# EAGLE board at32uc3a3256_usb_i2s (EAGLE 9.5.1)
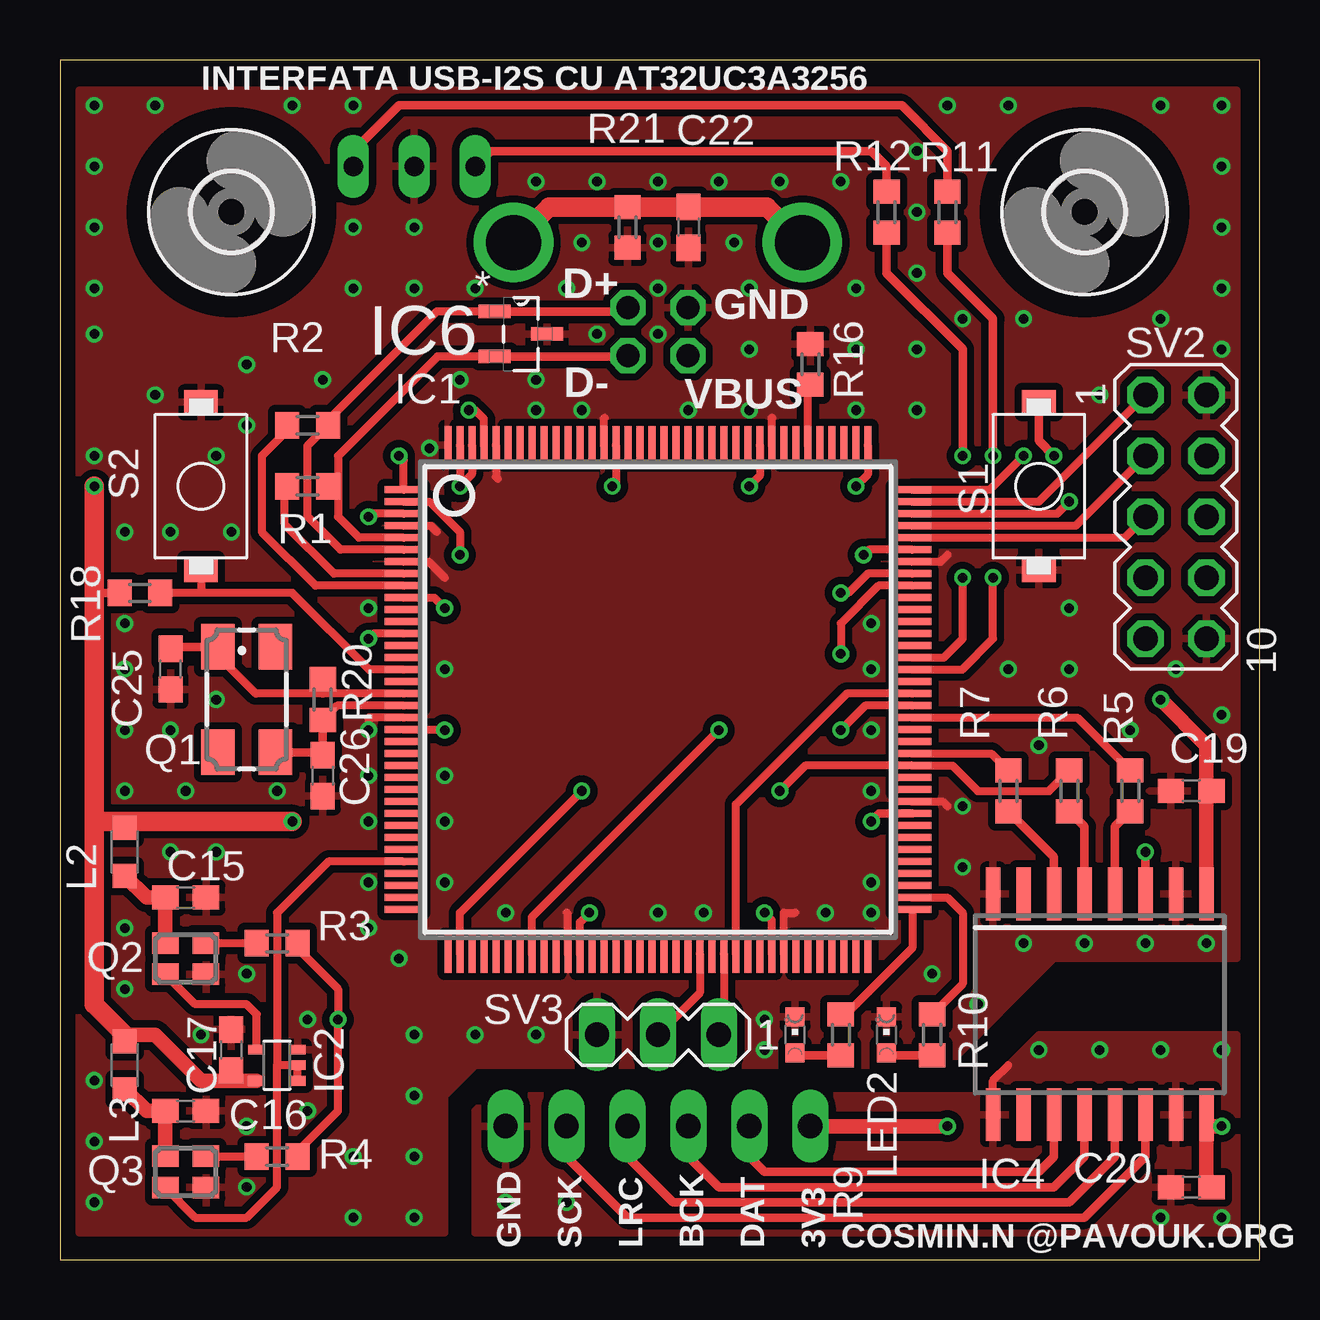
[diagram p0: board, top side]
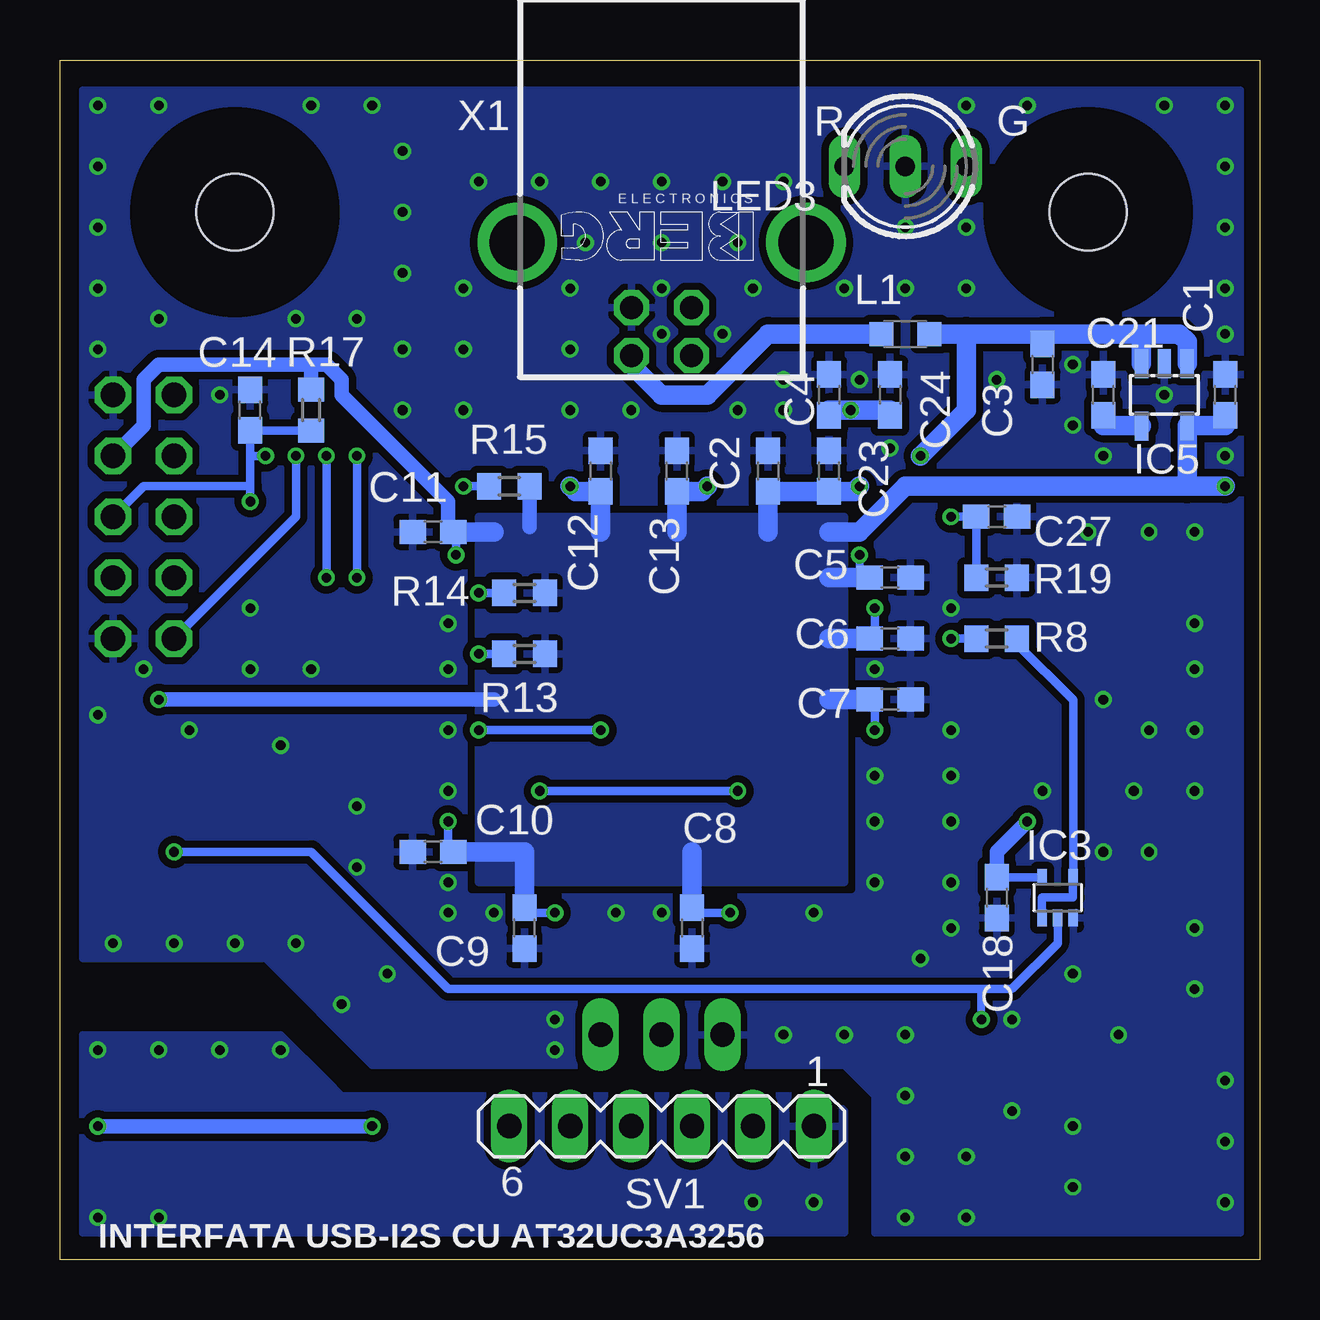
[diagram p1: board, bottom side, seen from below]

Size 50 x 50 mm. Coordinates in mm from the lower left corner, seen from the top.
Outline: 0,0 50,0 50,50 0,50 0,0
Copper layers (1*16): Top 0.035mm / dielectric 1.5mm / Bottom 0.035mm
Design rules "SeeedStudio_2layer_DRU_no_angle_20140221 *": minimum track width 6mil, minimum drill 12mil, track to track 6mil, track to pad 6mil, pad to pad 6mil, via to via 6mil, smd to smd 0mil, copper to edge 10mil, drill to drill 10mil, minimum pad ring 10mil, minimum via ring 6mil, stop-mask expansion 2mil, vias tented up to drill 100mil, thermal gap 10mil

## Footprints (pad centres in the part's own frame; a part is rotated, then mirrored left to right if it is on the bottom)
C0603 = smd 1.1 x 1: 1 -0.85,0; 2 0.85,0
3,2 = hole 3.2: 0,0
LQFP144 = smd 0.3 x 1.6: 1 -8.75,-10.6; 2 -8.25,-10.6; 3 -7.75,-10.6; 4 -7.25,-10.6; 5 -6.75,-10.6; 6 -6.25,-10.6; 7 -5.75,-10.6; 8 -5.25,-10.6; 9 -4.75,-10.6; 10 -4.25,-10.6; 11 -3.75,-10.6; 12 -3.25,-10.6; 13 -2.75,-10.6; 14 -2.25,-10.6; 15 -1.75,-10.6; 16 -1.25,-10.6; 17 -0.75,-10.6; 18 -0.25,-10.6; 19 0.25,-10.6; 20 0.75,-10.6; 21 1.25,-10.6; 22 1.75,-10.6; 23 2.25,-10.6; 24 2.75,-10.6; 25 3.25,-10.6; 26 3.75,-10.6; 27 4.25,-10.6; 28 4.75,-10.6; 29 5.25,-10.6; 30 5.75,-10.6; 31 6.25,-10.6; 32 6.75,-10.6; 33 7.25,-10.6; 34 7.75,-10.6; 35 8.25,-10.6; 36 8.75,-10.6; 73 8.75,10.6; 74 8.25,10.6; 75 7.75,10.6; 76 7.25,10.6; 77 6.75,10.6; 78 6.25,10.6; 79 5.75,10.6; 80 5.25,10.6; 81 4.75,10.6; 82 4.25,10.6; 83 3.75,10.6; 84 3.25,10.6; 85 2.75,10.6; 86 2.25,10.6; 87 1.75,10.6; 88 1.25,10.6; 89 0.75,10.6; 90 0.25,10.6; 91 -0.25,10.6; 92 -0.75,10.6; 93 -1.25,10.6; 94 -1.75,10.6; 95 -2.25,10.6; 96 -2.75,10.6; 97 -3.25,10.6; 98 -3.75,10.6; 99 -4.25,10.6; 100 -4.75,10.6; 101 -5.25,10.6; 102 -5.75,10.6; 103 -6.25,10.6; 104 -6.75,10.6; 105 -7.25,10.6; 106 -7.75,10.6; 107 -8.25,10.6; 108 -8.75,10.6 | smd 1.6 x 0.3: 37 10.6,-8.75; 38 10.6,-8.25; 39 10.6,-7.75; 40 10.6,-7.25; 41 10.6,-6.75; 42 10.6,-6.25; 43 10.6,-5.75; 44 10.6,-5.25; 45 10.6,-4.75; 46 10.6,-4.25; 47 10.6,-3.75; 48 10.6,-3.25; 49 10.6,-2.75; 50 10.6,-2.25; 51 10.6,-1.75; 52 10.6,-1.25; 53 10.6,-0.75; 54 10.6,-0.25; 55 10.6,0.25; 56 10.6,0.75; 57 10.6,1.25; 58 10.6,1.75; 59 10.6,2.25; 60 10.6,2.75; 61 10.6,3.25; 62 10.6,3.75; 63 10.6,4.25; 64 10.6,4.75; 65 10.6,5.25; 66 10.6,5.75; 67 10.6,6.25; 68 10.6,6.75; 69 10.6,7.25; 70 10.6,7.75; 71 10.6,8.25; 72 10.6,8.75; 109 -10.6,8.75; 110 -10.6,8.25; 111 -10.6,7.75; 112 -10.6,7.25; 113 -10.6,6.75; 114 -10.6,6.25; 115 -10.6,5.75; 116 -10.6,5.25; 117 -10.6,4.75; 118 -10.6,4.25; 119 -10.6,3.75; 120 -10.6,3.25; 121 -10.6,2.75; 122 -10.6,2.25; 123 -10.6,1.75; 124 -10.6,1.25; 125 -10.6,0.75; 126 -10.6,0.25; 127 -10.6,-0.25; 128 -10.6,-0.75; 129 -10.6,-1.25; 130 -10.6,-1.75; 131 -10.6,-2.25; 132 -10.6,-2.75; 133 -10.6,-3.25; 134 -10.6,-3.75; 135 -10.6,-4.25; 136 -10.6,-4.75; 137 -10.6,-5.25; 138 -10.6,-5.75; 139 -10.6,-6.25; 140 -10.6,-6.75; 141 -10.6,-7.25; 142 -10.6,-7.75; 143 -10.6,-8.25; 144 -10.6,-8.75
SC70-5 = smd 0.4 x 0.7: 1 -0.65,-0.85; 2 0,-0.85; 3 0.65,-0.85; 4 0.65,0.85; 5 -0.65,0.85
SO-16DW = smd 0.6 x 2.2: 1 -4.445,-4.6; 2 -3.175,-4.6; 3 -1.905,-4.6; 4 -0.635,-4.6; 5 0.635,-4.6; 6 1.905,-4.6; 7 3.175,-4.6; 8 4.445,-4.6; 9 4.445,4.6; 10 3.175,4.6; 11 1.905,4.6; 12 0.635,4.6; 13 -0.635,4.6; 14 -1.905,4.6; 15 -3.175,4.6; 16 -4.445,4.6
SOT23-DBV = smd 0.55 x 1.2: 1 -0.95,-1.3; 2 0,-1.3; 3 0.95,-1.3; 4 0.95,1.3; 5 -0.95,1.3
SOT95P237X112-3N = smd 1.321 x 0.559: 1 -1.092,0.94; 2 -1.092,-0.94; 3 1.092,0
L2012C = smd 1 x 1: 1 -1,0; 2 1,0
CHIPLED_0603 = smd 0.8 x 0.8: A 0,-0.75; C 0,0.75
DUOLED5MM = drill 0.813 long: AG -2.54,0; AR 2.54,0; K 0,0
CTS406 = smd 1.9 x 1.4: 1 -2.2,-1.2; 2 2.2,-1.2; 3 2.2,1.2; 4 -2.2,1.2
CRYSTAL2.5X2 = smd 1.1 x 0.9: 1 -0.85,-0.65; 2 0.85,-0.65; 3 0.85,0.65; 4 -0.85,0.65
R0603 = smd 1 x 1.1: 1 -0.85,0; 2 0.85,0
SWITCH-KSR = smd 1 x 1.4: 1 -3.5,0; 2 3.5,0
MA06-1 = drill 1.016 long: 1 -6.35,0; 2 -3.81,0; 3 -1.27,0; 4 1.27,0; 5 3.81,0; 6 6.35,0
MA05-2 = drill 1.016 octagon: 1 -5.08,-1.27; 2 -5.08,1.27; 3 -2.54,-1.27; 4 -2.54,1.27; 5 0,-1.27; 6 0,1.27; 7 2.54,-1.27; 8 2.54,1.27; 9 5.08,-1.27; 10 5.08,1.27
MA03-1 = drill 1.016 long: 1 -2.54,0; 2 0,0; 3 2.54,0
PN61729-S = drill 0.95 octagon: 1 1.25,4.71; 2 -1.25,4.71; 3 -1.25,2.71; 4 1.25,2.71 | drill 2.3 pad 2.9: S1 -6.02,0; S2 6.02,0

## Placement (x,y rotation side)
C1  10uF  [C0603]  1.43,36.04 90 bottom
C2  4u7  [C0603]  20.48,32.87 90 bottom
C3  2u2  [C0603]  9.05,37.31 270 bottom
C4  2u2  [C0603]  17.94,36.04 270 bottom
C5  100nF  [C0603]  15.4,28.42 0 bottom
C6  100nF  [C0603]  15.4,25.88 0 bottom
C7  100nF  [C0603]  15.4,23.34 0 bottom
C8  100nF  [C0603]  23.66,13.81 270 bottom
C9  100nF  [C0603]  30.64,13.81 90 bottom
C10  100nF  [C0603]  34.45,16.99 0 bottom
C11  100nF  [C0603]  34.45,30.33 0 bottom
C12  100nF  [C0603]  27.47,32.87 270 bottom
C13  100nF  [C0603]  24.29,32.87 270 bottom
C14  100nF  [C0603]  42.07,35.41 90 bottom
C15  100nF  [C0603]  5.24,15.09 180 top
C16  100nF  [C0603]  5.24,6.2 180 top
C17  100nF  [C0603]  7.15,8.73 90 top
C18  100nF  [C0603]  10.96,15.09 270 bottom
C19  100nF  [C0603]  47.15,19.53 0 top
C20  100nF  [C0603]  47.15,3.02 180 top
C21  10nF  [C0603]  6.51,36.04 90 bottom
C22  4n7  [C0603]  26.2,43.03 270 top
C23  1nF  [C0603]  17.94,32.87 90 bottom
C24  470pF  [C0603]  15.4,36.04 270 bottom
C25  18pF  [C0603]  4.61,24.61 270 top
C26  18pF  [C0603]  10.96,20.16 270 top
C27  10pF  [C0603]  10.96,30.96 0 bottom
H1  MOUNT-HOLE3.2  [3,2]  7.15,43.66 0 top
H2  MOUNT-HOLE3.2  [3,2]  42.71,43.66 0 top
IC1  AT32UC3A3256  [LQFP144]  24.93,23.34 270 top
IC2  74LVC1G00DCK  [SC70-5]  9.05,8.1 90 top
IC3  74LVC1G80DCK  [SC70-5]  8.42,15.09 0 bottom
IC4  ISO7240  [SO-16DW]  43.34,10.64 180 top
IC5  LP2992-3V3  [SOT23-DBV]  3.97,36.04 180 bottom
IC6  TPD2E009DBZR  [SOT95P237X112-3N]  19.21,38.58 0 top
L1  FB  [L2012C]  14.76,38.58 0 bottom
L2  FB  [L2012C]  2.7,16.99 270 top
L3  FB  [L2012C]  2.7,8.1 270 top
LED1  RED  [CHIPLED_0603]  30.64,9.37 0 top
LED2  GREEN  [CHIPLED_0603]  34.45,9.37 0 top
LED3  DUAL 3mm  [DUOLED5MM]  14.76,45.56 180 bottom
Q1  12MHz  [CTS406]  7.78,23.34 270 top
Q2  22.5792MHz  [CRYSTAL2.5X2]  5.24,12.55 0 top
Q3  24.576MHz  [CRYSTAL2.5X2]  5.24,3.66 0 top
R1  39R  [R0603]  10.32,32.23 180 top
R2  39R  [R0603]  10.32,34.77 180 top
R3  39R  [R0603]  9.05,13.18 180 top
R4  39R  [R0603]  9.05,4.29 0 top
R5  39R  [R0603]  44.61,19.53 90 top
R6  39R  [R0603]  42.07,19.53 90 top
R7  39R  [R0603]  39.53,19.53 90 top
R8  39R  [R0603]  10.96,25.88 0 bottom
R9  470  [R0603]  32.55,9.37 270 top
R10  470  [R0603]  36.36,9.37 270 top
R11  470  [R0603]  36.99,43.66 90 top
R12  470  [R0603]  34.45,43.66 90 top
R13  4k7  [R0603]  30.64,25.24 0 bottom
R14  4k7  [R0603]  30.64,27.78 0 bottom
R15  4k7  [R0603]  31.27,32.23 180 bottom
R16  4k7  [R0603]  31.27,37.31 270 top
R17  4k7  [R0603]  39.53,35.41 90 bottom
R18  4k7  [R0603]  3.34,27.78 0 top
R19  6k8  [R0603]  10.96,28.42 180 bottom
R20  1M  [R0603]  10.96,23.34 270 top
R21  1M  [R0603]  23.66,43.03 270 top
S1  RESET  [SWITCH-KSR]  40.8,32.23 90 top
S2  PROG  [SWITCH-KSR]  5.88,32.23 270 top
SV1  MA06-1  [MA06-1]  24.93,5.56 180 bottom
SV2  MA05-2  [MA05-2]  46.52,30.96 270 top
SV3  MA03-1  [MA03-1]  24.93,9.37 180 top
X1  PN61729-S  [PN61729-S]  24.93,42.39 180 bottom

## Library data of the parts
C1-C27 L1-L3 R1-R21 = rcl
H1 H2 = holes
IC1 = at32uc
IC2 IC3 = 74xx-little-de
IC4 = texas; MPN: ISO7240MDW; OC_FARNELL: 1755124; OC_NEWARK: 58M0385
IC5 = texas; MF: TEXAS INSTRUMENTS; MPN: TPS77001DBVT; OC_FARNELL: 8461554; OC_NEWARK: 77C1171
IC6 = pavouk; MPN: TPD2E009DBZR; OC_FARNELL: 1755715; OC_NEWARK: 14R9549; PACKAGE: SOT-23-3; SUPPLIER: Texas Instruments
LED1-LED3 = led
Q1 = crystal; OC_FARNELL: unknown; OC_NEWARK: unknown
Q2 Q3 S1 S2 = pavouk
SV1-SV3 = con-lstb; OC_FARNELL: unknown; OC_NEWARK: unknown
X1 = con-berg; OC_FARNELL: unknown; OC_NEWARK: unknown

## Nets
AD_LRCK: IC1.44 IC1.90
AD_SCLK: IC1.61 IC1.91
DA_LRCK: IC1.89 R5.2
DA_SCLK: IC1.38 IC1.85 R6.2
GND: C1.2 C2.2 C3.2 C4.1 C5.2 C6.2 C7.2 C8.2 C9.1 C10.1 C11.1 C12.1 C13.1 C14.2 C15.1 C16.1 C17.2 C18.2 C19.1 C21.2 C22.2 C23.2 C24.1 C25.2 C26.2 C27.2 IC1.4 IC1.7 IC1.20 IC1.47 IC1.65 IC1.82 IC1.102 IC1.117 IC1.131 IC1.140 IC1.144 IC2.3 IC3.3 IC4.2 IC4.8 IC5.2 IC6.3 LED1.C LED2.C LED3.K Q2.2 Q3.2 R16.1 R19.1 R21.2 S1.1 S2.1 SV2.2 SV2.10 SV3.3 X1.4
GND2: C20.2 IC4.9 IC4.15 SV1.1
GPIO_05_LED2: IC1.94 R12.1
GPIO_08_LED1: IC1.93 R11.1
LRCK: IC4.4 R5.1
MCLK: IC3.2 IC4.3 R3.1 R4.2
MCLK_MCU: IC1.13 R8.1
MCLK_P48_N441: IC1.32 IC2.1 IC2.2 Q3.1
N$1: C15.2 L2.2 Q2.4
N$2: IC1.5 IC6.2 R1.1 X1.2
N$3: Q3.3 R4.1
N$4: Q2.3 R3.2
N$5: C16.2 L3.2 Q3.4
N$6: IC1.6 IC6.1 R2.1 X1.3
N$7: IC1.8 R1.2
N$8: C26.1 IC1.19 Q1.3 R20.2
N$9: C25.1 IC1.18 Q1.1 R20.1
N$10: IC1.9 R2.2
N$11: C4.2 C24.2 IC1.141
N$12: IC1.108 SV2.9
N$13: IC1.114 R16.2
N$14: C22.1 R21.1 X1.S1 X1.S2
N$15: C27.1 IC1.3 R19.2
N$16: C20.1 IC4.16 SV1.6
N$17: IC4.14 SV1.2
N$18: IC4.13 SV1.3
N$19: IC4.12 SV1.4
N$20: LED1.A R9.2
N$21: LED2.A R10.2
N$22: IC1.74 R10.1
N$23: IC1.73 R9.1
N$24: IC1.109 R15.2
N$25: IC1.101 R14.1
N$26: IC1.100 R13.1
N$27: IC4.11 SV1.5
N$28: IC4.5 R6.1
N$29: IC1.86 R7.2
N$30: IC4.6 R7.1
N$31: IC3.1 IC3.4 R8.2
N$32: L1.1 X1.1
N$33: LED3.AG R11.2
N$34: C21.1 IC5.4
N$35: LED3.AR R12.2
N$36: IC2.4 Q2.1
NSRST: C14.1 IC1.106 R17.1 S1.2 SV2.6
PROG: IC1.16 R18.2 S2.2
TCK: IC1.107 SV2.1
TDO: IC1.105 SV2.3
TMS: IC1.104 SV2.5
UART_RX: IC1.60 SV3.1
UART_TX: IC1.58 SV3.2
VBUS: C3.1 IC1.1 IC5.1 IC5.3 L1.2
VCC: C1.1 C2.1 C5.1 C6.1 C7.1 C8.1 C9.2 C10.2 C11.2 C12.2 C13.2 C17.1 C18.1 C19.2 C23.1 IC1.2 IC1.10 IC1.21 IC1.48 IC1.64 IC1.81 IC1.103 IC1.118 IC1.130 IC1.142 IC1.143 IC2.5 IC3.5 IC4.1 IC5.5 L2.1 L3.1 R13.2 R14.2 R15.1 R17.2 R18.1 SV2.4

## Tracks (layer width: path | path; a pad name or v marks a point on that pad's centre or on a via)
AD_LRCK  (via drill 0.4)
  Top 0.33: v27.47,22.07 19.67,14.28 IC1.44 | IC1.90 33.57,23.09 v32.55,22.07
  Bottom 0.356: v32.55,22.07 v27.47,22.07
AD_SCLK
  Top 0.33: IC1.91 32.8,23.59 28.18,18.97 IC1.61
DA_LRCK
  Top 0.33: IC1.89 42.4,22.59 R5.2
DA_SCLK  (via drill 0.4)
  Top 0.33: v30.01,19.53 31.07,20.59 IC1.85 37.2,20.59 38.26,19.53 41.22,19.53 R6.2 | v21.75,19.53 16.67,14.45 IC1.38
  Bottom 0.356: v30.01,19.53 v21.75,19.53
GND  (via drill 0.4)
  Top 0.33: IC1.102 36.71,29.09 36.99,29.37 | IC1.20 12.86,22.59 v12.86,22.07 | IC1.7 15.37,29.09 16.04,28.42 | IC1.4 15.45,30.59 15.72,30.33 | IC1.140 18.17,32.63 18.26,32.55 | IC1.131 22.68,35.06 22.7,35.09 | IC1.117 29.68,35.08 29.69,35.09 | IC1.82 36.8,19.09 36.99,18.9 | IC1.65 30.18,14.45 30.64,14.45 | IC1.47 21.17,14.39 21.12,14.45
  other vias: 29.37,8.73 36.36,11.91 47.79,13.18 45.25,13.18 42.71,13.18 40.16,13.18 38.26,10.64 19.84,9.37 17.3,9.37 14.76,9.37 14.76,6.83 14.76,1.75 14.76,4.29 12.22,1.75 1.43,2.38 1.43,4.92 1.43,7.47 4.61,16.99 6.51,16.99 14.13,12.55 12.86,15.72 12.86,13.81 12.86,18.26 12.86,20.16 16.04,15.72 16.04,18.26 16.04,20.16 16.04,24.61 9.05,19.53 5.24,19.53 2.7,19.53 2.7,22.07 2.7,24.61 2.7,26.52 6.51,23.34 12.86,27.15 15.4,33.82 22.39,38.58 24.93,38.58 21.75,35.41 26.2,35.41 28.73,35.41 28.73,37.94 43.34,36.04 35.72,43.66 35.72,46.2 35.72,41.12 37.62,39.22 37.62,18.9 37.62,16.35 40.8,21.44 33.82,22.07 33.82,19.53 33.82,14.45 33.82,15.72 31.91,14.45 26.83,14.45 24.93,14.45 18.58,14.45 33.82,26.52 33.82,24.61 39.53,24.61 42.07,24.61 42.07,27.15 46.52,24.61 48.42,22.7 44.61,22.07 10.96,36.67 7.78,37.31 3.97,36.04 7.78,34.77 6.51,33.5 7.15,30.33 4.61,30.33 2.7,30.33 1.43,33.5 12.22,40.48 14.76,40.48 17.3,40.48 14.76,43.03 28.73,40.48 33.18,40.48 33.18,37.94 35.72,37.94 35.72,35.41 33.18,35.41 1.43,38.58 1.43,40.48 1.43,43.03 1.43,45.56 1.43,48.11 3.97,48.11 12.22,48.11 12.22,43.03 19.84,44.93 22.39,44.93 30.01,44.93 27.47,44.93 24.93,44.93 36.99,48.11 39.53,48.11 48.42,48.11 45.88,48.11 48.42,45.56 48.42,43.03 48.42,40.48 48.42,37.94 45.88,39.22 40.16,39.22 9.69,48.11 29.37,10.01 32.55,44.93 7.78,5.56 7.78,11.91 5.88,9.37 10.32,10.01 10.32,6.2 2.7,13.81 2.7,11.27 7.78,3.02 12.22,4.29 4.61,22.07 24.93,42.39 21.12,40.48 24.93,40.48 21.75,42.39 28.1,42.39 19.84,36.67 19.84,35.41 16.67,36.67
  pour Bottom (isolate 0.305, rank 2): 0.79,48.74 49.05,48.74 49.05,12.55 41.44,12.55 36.99,8.1 17.3,8.1 16.04,6.83 16.04,1.11 0.79,1.11
  pour Top (isolate 0.305, rank 2): 0.79,48.74 49.05,48.74 49.05,12.55 41.44,12.55 36.99,8.1 17.3,8.1 16.04,6.83 16.04,1.11 0.79,1.11
GND2  (via drill 0.4)
  Top 0.33: IC4.9 38.9,7.47 39.53,8.1
  other vias: 48.42,8.73 45.88,8.73 43.34,8.73 40.8,8.73 48.42,1.75 45.88,1.75 18.58,2.38 21.12,2.38
  pour Top (isolate 0.305, rank 2): 49.05,9.37 40.8,9.37 38.26,6.83 17.94,6.83 17.3,6.2 17.3,1.11 49.05,1.11
  pour Bottom (isolate 0.305, rank 2): 49.05,1.11 49.05,9.37 40.8,9.37 38.9,7.47 38.26,6.83 17.94,6.83 17.3,6.2 17.3,1.11
GPIO_05_LED2  (via drill 0.4)
  Top 0.33: IC1.94 36.84,25.09 37.62,25.88 v37.62,28.42
  Top 0.356: v37.62,33.5 37.62,37.94 34.45,41.12 R12.1
  Bottom 0.356: v37.62,28.42 v37.62,33.5
GPIO_08_LED1  (via drill 0.4)
  Top 0.33: IC1.93 37.61,24.59 38.9,25.88 v38.9,28.42
  Top 0.356: v38.9,33.5 38.9,39.22 36.99,41.12 R11.1
  Bottom 0.356: v38.9,28.42 v38.9,33.5
LRCK
  Top 0.356: IC4.4 43.98,18.05 R5.1
MCLK  (via drill 0.4)
  Top 0.33: R4.2 9.9,4.51 11.59,6.2 v11.59,10.01 11.59,11.27 9.9,12.97 R3.1
  Top 0.356: IC4.3 v45.25,16.99
  Bottom 0.33: v11.59,10.01 11.59,11.27
  Bottom 0.356: v45.25,16.99 39.53,16.99 33.82,11.27 11.59,11.27 10.32,11.27 8.42,13.18 IC3.2
MCLK_MCU  (via drill 0.4)
  Top 0.33: IC1.13 13.07,26.09 v12.86,25.88
  Bottom 0.356: v12.86,25.88 R8.1
MCLK_P48_N441
  Top 0.33: IC1.32 11.19,16.59 9.05,14.45 9.05,8.1 | 9.05,8.1 IC2.2 IC2.1 | 9.05,8.1 9.05,3.02 7.78,1.75 5.65,1.75 Q3.1
N$1
  Top 0.61: L2.2 3.61,15.09 C15.2 Q2.4
N$2
  Top 0.33: IC6.2 15.73,37.64 11.59,33.5 11.59,32.23 | 11.59,32.23 11.59,30.96 12.46,30.09 IC1.5 | R1.1 11.59,32.23
  Top 0.356: IC6.2 23.68,37.64 X1.2
N$3
  Top 0.33: Q3.3 8.19,4.3 R4.1
N$4
  Top 0.33: Q2.3 8.19,13.2 R3.2
N$5
  Top 0.61: 2.85,7.1 L3.2 3.61,6.2 C16.2 Q3.4
N$6
  Top 0.33: IC6.1 15.71,39.52 11.17,34.98 R2.1 10.32,33.92 10.32,30.96 11.69,29.59 IC1.6
  Top 0.356: IC6.1 23.68,39.52 X1.3
N$7
  Top 0.33: IC1.8 11.42,28.59 9.37,30.64 9.37,32.23 R1.2
N$8
  Top 0.33: IC1.19 11.56,23.09 R20.2
  Top 0.356: 8.98,21.37 Q1.3 10.96,21.14 | 10.96,22.7 R20.2 10.96,21.14 | 10.96,21.14 C26.1
N$9
  Top 0.33: IC1.18 10.96,23.59 | 10.96,23.59 R20.1 | 6.58,25.17 8.17,23.59 10.96,23.59
  Top 0.356: 6.58,25.17 Q1.1 4.61,25.54 C25.1
N$10
  Top 0.33: IC1.9 10.65,28.09 8.42,30.33 8.42,33.5 9.47,34.56 R2.2
N$11  (via drill 0.4)
  Top 0.33: IC1.141 17.67,35.03 17.3,35.41 v17.04,35.41
  Bottom 0.813: C4.2 17.94,35.41 v17.04,35.41 15.4,35.41 C24.2
N$12  (via drill 0.4)
  Top 0.33: IC1.108 38.76,32.09 v40.16,33.5
  Bottom 0.356: SV2.9 40.16,30.96 v40.16,33.5
N$13
  Top 0.33: IC1.114 31.18,36.36 R16.2
N$14
  Top 0.813: X1.S1 20.39,43.88 R21.1 C22.1 29.46,43.88 X1.S2
N$15  (via drill 0.4)
  Top 0.33: IC1.3 12.99,31.09 v12.86,30.96
  Bottom 0.356: v12.86,30.96 C27.1 R19.2
N$16  (via drill 0.4)
  Top 0.356: 47.79,5.56 IC4.16
  Top 0.61: SV1.6 v36.99,5.56 | v48.42,5.56 47.79,5.56 | C20.1 47.79,3.02 IC4.16
  Bottom 0.61: v36.99,5.56 v48.42,5.56
N$17
  Top 0.356: SV1.2 21.12,4.29 23.66,1.75 42.71,1.75 45.25,4.29 IC4.14
N$18
  Top 0.356: SV1.3 23.66,4.29 25.56,2.38 42.07,2.38 43.98,4.29 IC4.13
N$19
  Top 0.356: SV1.4 26.2,4.29 27.47,3.02 41.44,3.02 42.71,4.29 IC4.12
N$20
  Top 0.356: LED1.A 30.64,8.52 R9.2
N$21
  Top 0.356: LED2.A 34.45,8.52 R10.2
N$22
  Top 0.33: IC1.74 36.98,15.09 37.62,14.45 37.62,11.49 R10.1
N$23
  Top 0.33: IC1.73 35.52,12.98 32.76,10.22 R9.1
N$24  (via drill 0.4)
  Top 0.33: IC1.109 33.68,32.73 v33.18,32.23
  Bottom 0.356: v33.18,32.23 R15.2
N$25  (via drill 0.4)
  Top 0.33: IC1.101 33.67,28.59 32.86,27.78 v32.55,27.78
  Bottom 0.356: v32.55,27.78 R14.1
N$26  (via drill 0.4)
  Top 0.33: IC1.100 34.12,28.09 32.55,26.52 v32.55,25.24
  Bottom 0.356: v32.55,25.24 R13.1
N$27
  Top 0.356: SV1.5 28.73,4.29 29.37,3.66 40.8,3.66 41.44,4.29 IC4.11
N$28
  Top 0.356: IC4.5 42.71,18.05 R6.1
N$29
  Top 0.33: IC1.86 38.82,21.09 R7.2
N$30
  Top 0.356: IC4.6 41.44,16.77 R7.1
N$31
  Bottom 0.356: IC3.1 9.06,15.07 9.05,15.09 7.78,15.09 7.78,15.92 IC3.4 7.76,23.33 10.1,25.66 R8.2
N$32
  Bottom 0.813: X1.1 26.18,37.29 24.93,36.04 23.02,36.04 20.48,38.58 L1.1
N$33
  Top 0.356: R11.2 36.99,46.2 35.09,48.11 14.13,48.11 12.22,46.2 LED3.AG
N$34
  Bottom 0.813: C21.1 6.51,34.77 4.92,34.77 IC5.4
N$35
  Top 0.356: R12.2 34.45,45.56 33.82,46.2 17.94,46.2 LED3.AR
N$36
  Top 0.33: IC2.4 8.2,10.22 7.78,10.64 5.65,10.64 Q2.1
NSRST  (via drill 0.4)
  Top 0.33: IC1.106 41.57,31.09 v42.07,31.59
  Top 0.356: S1.2 40.8,34.14 v41.44,33.5
  Bottom 0.356: v42.07,31.59 42.07,32.23 | 42.07,32.23 42.07,33.5 | 42.07,33.5 C14.1 R17.1 | SV2.6 46.52,32.23 42.07,32.23 | v41.44,33.5 42.07,33.5
PROG
  Top 0.33: IC1.16 12.88,24.59 9.69,27.78 5.88,27.78 | 5.88,27.78 R18.2 | S2.2 5.88,27.78
TCK
  Top 0.33: IC1.107 40.8,31.59 SV2.1
TDO
  Top 0.33: IC1.105 42.34,30.59 SV2.3
TMS
  Top 0.33: IC1.104 44.38,30.09 SV2.5
UART_RX
  Top 0.33: IC1.60 27.68,9.58 SV3.1
UART_TX
  Top 0.33: IC1.58 26.68,11.12 SV3.2
VBUS  (via drill 0.4)
  Top 0.33: IC1.1 14.33,33.3 v14.13,33.5
  Bottom 0.813: IC5.1 3.02,38.27 3.34,38.58 4.92,38.58 | 4.92,38.58 9.05,38.58 | C3.1 9.05,38.58 | IC5.3 4.92,38.58 | L1.2 12.22,38.58 | 12.22,38.58 9.05,38.58 | v14.13,33.5 12.22,35.41 12.22,38.58
VCC  (via drill 0.4)
  Top 0.33: IC1.143 v16.67,32.23 | IC1.118 29.18,32.67 v28.73,32.23 | IC1.130 23.18,32.38 v23.02,32.23 | IC1.142 17.17,32.73 v16.67,32.23 | IC1.2 15.4,31.59 16.67,30.33 v16.67,29.37 | IC1.10 15.6,27.59 v16.04,27.15 | IC1.21 16.02,22.09 | IC1.48 21.68,14.06 v22.07,14.45 | IC1.103 33.72,29.59 v33.5,29.37 | IC1.64 29.68,14.15 v29.37,14.45
  Top 0.356: v16.67,32.23 | 16.02,22.09 v16.04,22.07 | IC1.81 34.15,18.59 v33.82,18.26 | R18.1 1.43,27.78
  Top 0.61: IC4.1 47.79,19.53 | C19.2 47.79,19.53 | 47.79,19.53 47.79,21.44 v45.88,23.34 | IC2.5 7.15,7.45 | 7.15,7.45 C17.1 | 7.15,7.45 5.89,7.45 3.97,9.37 2.7,9.37
  Top 0.813: 1.43,18.26 1.43,10.64 2.7,9.37 L3.1 | 1.43,18.26 1.43,27.78 v1.43,32.23 | L2.1 2.7,18.26 | 2.7,18.26 1.43,18.26 | v9.69,18.26 2.7,18.26
  Bottom 0.33: v16.67,29.37 16.67,28.42
  Bottom 0.356: v16.04,27.15 16.04,25.88 C6.1 | v16.04,22.07 16.04,23.12 C7.1 | v22.07,14.45 23.44,14.45 C8.1 | v29.37,14.45 30.43,14.45 C9.2 | v33.82,18.26 33.82,17.2 C10.2 | 33.82,30.33 C11.2 | IC3.5 C18.1 | 33.5,30.33 v33.5,29.37
  Bottom 0.61: SV2.4 46.52,34.77 46.52,36.67 45.88,37.31 39.53,37.31 | 39.53,37.31 38.9,37.31 38.26,36.67 38.26,36.04 33.82,31.59 33.82,30.33 33.5,30.33 | R17.2 39.53,37.31 | v45.88,23.34 31.91,23.34 | R15.1 30.43,30.54 | C18.1 10.96,16.99 v9.69,18.26
  Bottom 0.813: C1.1 1.43,34.77 3.02,34.77 IC5.5 3.02,32.23 | v1.43,32.23 3.02,32.23 | 3.02,32.23 14.76,32.23 16.67,30.33 17.94,30.33 | 27.47,30.33 C12.2 28.52,32.02 v28.73,32.23 | 24.29,30.33 C13.2 23.23,32.02 v23.02,32.23 | 20.48,30.33 C2.1 C23.1 16.88,32.02 v16.67,32.23 | C6.1 17.94,25.88 | 17.94,28.42 16.67,28.42 C5.1 | C7.1 17.94,23.34 | C9.2 30.64,16.99 C10.2 | C11.2 33.5,30.33 31.91,30.33 | 23.66,16.99 C8.1
  pour Bottom (isolate 0.305): 17.3,30.96 32.55,30.96 32.55,15.72 17.3,15.72

## Text on the board
tNames: INTERFATA USB-I2S CU AT32UC3A3256 | D+ | GND | D- | VBUS | GND | SCK | LRC | BCK | DAT | 3V3 | COSMIN.N @PAVOUK.ORG
bNames: G | R | INTERFATA USB-I2S CU AT32UC3A3256